# Altium PCB B303CA.PcbDoc
Units mm, origin at the board's own origin, x right, y up, seen from the top; angles counter-clockwise.
Board outline 29.99 x 10 mm, 4 copper layers (Top Layer, Int1, Int2, Bottom Layer), stack 1.547 mm thick; 2 components, 2 nets, 10 pads, 2 vias.
Unrouted connection lines stored in the file: 2.
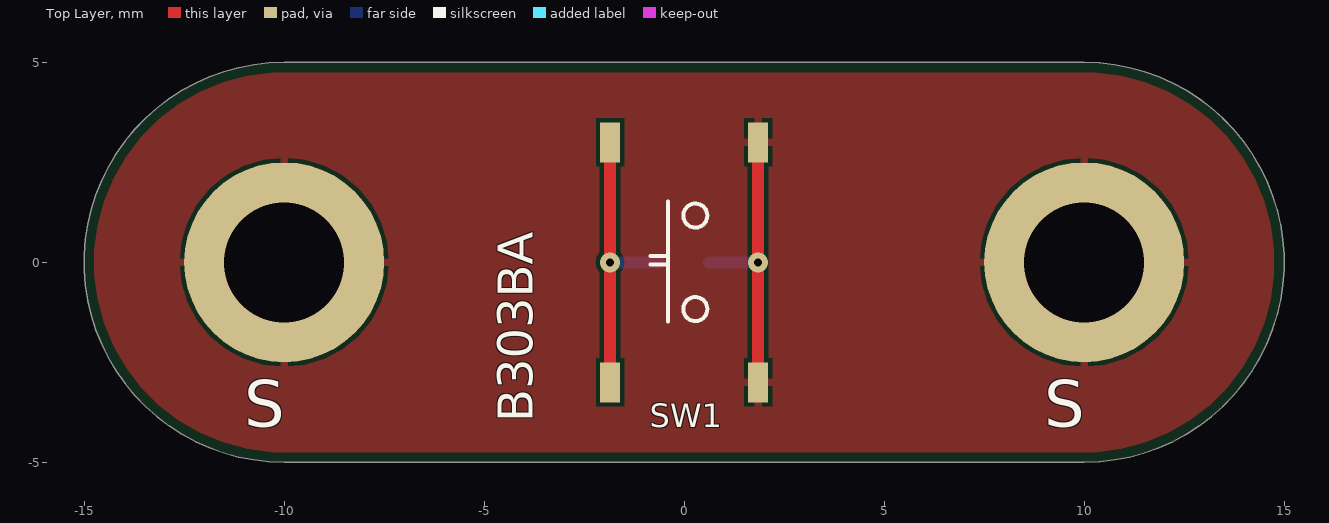
[diagram p0: Top Layer view]
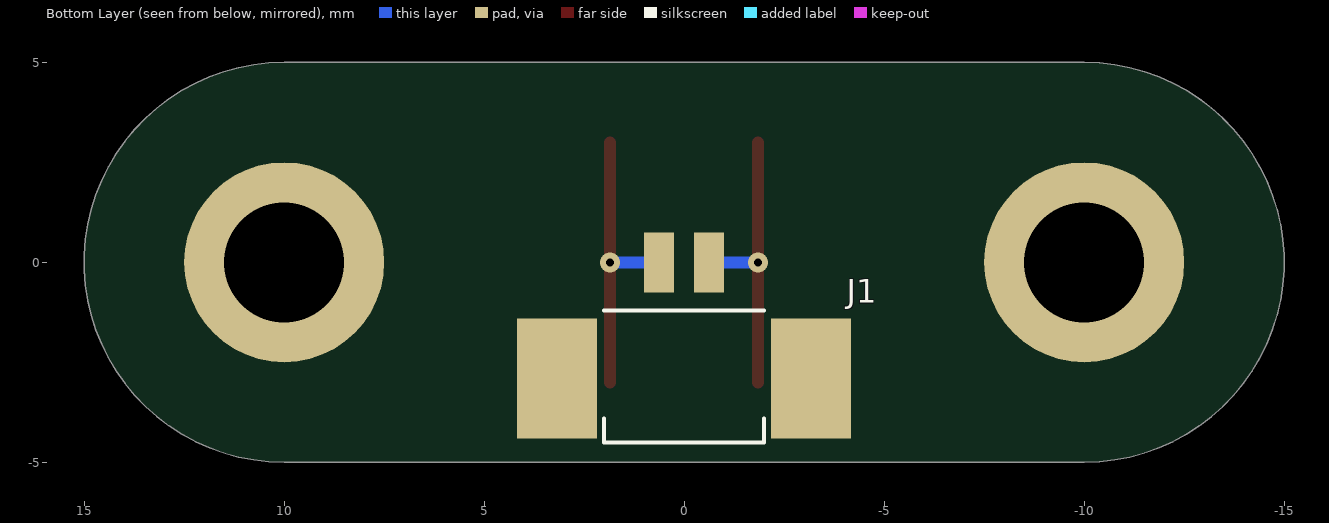
[diagram p1: Bottom Layer view, seen from below]

## Layer stack, top to bottom
Top Solder: solder mask 0.0254, SM-001, Dk 4
Top Layer: signal copper 0.035
Dielectric 1: prepreg 0.2083, PP-022, Dk 4.5
Int1: signal copper 0.035
Dielectric 3: core 0.9906, Core-042, Dk 4.6
Int2: signal copper 0.035
Dielectric 5: prepreg 0.2083, PP-022, Dk 4.5
Bottom Layer: signal copper 0.035
Bottom Solder: solder mask 0.0254, SM-001, Dk 4

## Board outline
-10,-5 10,-5 ccw(c10,0) 10,5 -10,5 ccw(c-10,0)

## Design rules (kind name [scope] priority, off if disabled: settings)
BoardOutlineClearance [All] p1: gap=0.25 ignorepadtopadclearanceinfootprint=FALSE except(0: Arc-SplitContinuation Track-SplitContinuation SMDPad-SplitContinuation THPad-SplitContinuation Via-SplitContinuation Fill-SplitContinuation Poly-SplitContinuation Region-SplitContinuation Text-SplitContinuation)
Clearance Clearance-xPP-xTP-xTT [All] p1: gap=0.1 ignorepadtopadclearanceinfootprint=FALSE except(0: Arc-Hole Track-Hole SMDPad-Hole THPad-Hole Via-Hole Fill-Hole Poly-Hole Region-Hole Text-Hole)
ComponentClearance [All] p1: gap=0.25 collisioncheckmode=3 verticalgap=0.25 showdistances=FALSE
DiffPairsRouting [All] p1: maxlimit=0.25 minlimit=0.25 mostfreqgap=0.25 toplayer_minwidth=0.381 toplayer_maxwidth=0.381 toplayer_prefwidth=0.381 midlayer1_minwidth=0.381 midlayer1_maxwidth=0.381 midlayer1_prefwidth=0.381 midlayer2_minwidth=0.381 midlayer2_maxwidth=0.381 midlayer2_prefwidth=0.381 bottomlayer_minwidth=0.381 bottomlayer_maxwidth=0.381 bottomlayer_prefwidth=0.381 maxuncoupledlength=12.5
Height [All] p1: minheight=0 maxheight=25 prefheight=12.5
HoleSize HoleSize-PTH [All] p1: absolutevalues=TRUE maxlimit=5 minlimit=0.15 maxpercent=80.000 minpercent=20.000
HoleToHoleClearance [All] p1: gap=0.35 allowstackedmicrovias=TRUE
MinimumAnnularRing "Minimum IAR  <= 0.45mm" [((ObjectKind = 'Pad') OR (ObjectKind = 'Via')) And (Layer = 'MultiLayer') And (HoleDiameter <= AsMM(0.45))] p1: minimumring=0.125 // minimum inner annular ring for pads <= 0.45mm finished hole size
MinimumAnnularRing "Minimum IAR  > 0.45mm" [((ObjectKind = 'Pad') OR (ObjectKind = 'Via')) And (Layer = 'MultiLayer') And (HoleDiameter > AsMM(0.45))] p2: minimumring=0.125 // minimum inner annular ring for pads > 0.45mm finished hole size
MinimumAnnularRing Minimum-IAR [All] p3: minimumring=0.125
MinimumSolderMaskSliver [All] p1: minsoldermaskwidth=0.08
PlaneClearance [InNet('ANT_GSM')] p1: clearance=0.05
PlaneClearance PlaneClearance-IPI [All] p2: clearance=0.25
PlaneConnect [All] p1: planeconnectstyle=Relief reliefexpansion=0.175 reliefentries=4 reliefconductorwidth=0.2 reliefairgap=0.1
PolygonConnect PolygonConnect_Via [All vs (ObjectKind = 'Via') And (HoleDiameter <= AsMM(0.45))] p1: connectstyle=Direct reliefconductorwidth=0.254 reliefentries=4 polygonreliefangle="90 Angle" airgapwidth=0.254
PolygonConnect PolygonConnect-xTW [All] p2: connectstyle=Relief reliefconductorwidth=0.2 reliefentries=4 polygonreliefangle="90 Angle" airgapwidth=0.1
RoutingCorners [All] p1: cornerstyle=45-Degree minsetback=2.5 maxsetback=2.5
RoutingVias "RoutingVias <= 0.45mm" [(ObjectKind = 'Via') And (HoleDiameter <= AsMM(0.45))] p1: holewidth=0.2 width=0.55 viastyle="Through Hole" minholewidth=0.15 minwidth=0.5 maxholewidth=0.45 maxwidth=0.8
RoutingVias "RoutingVias > 0.45mm" [(ObjectKind = 'Via') And (HoleDiameter > AsMM(0.45))] p2: holewidth=0.5 width=0.85 viastyle="Through Hole" minholewidth=0.5 minwidth=0.85 maxholewidth=0.9 maxwidth=1.25
SilkToSilkClearance [All] p1: silktosilkclearance=0.2
SilkToSolderMaskClearance SilkscreenOverComponentPads [IsPad] p1: minsilkscreentomaskgap=0.1 clearancetoexposedcopper=TRUE
SolderMaskExpansion SolderMaskExpansion_Via [(ObjectKind = 'Via') And (HoleDiameter <= AsMM(0.45))] p1: expansion=0.01 istentingtop=TRUE soldermaskfromhole=TRUE
SolderMaskExpansion [All] p2: expansion=0.01 istentingtop=FALSE
UnRoutedNet [All] p1: checkbadconnections=TRUE
Width Width-xTW [All] p1: maxlimit=1.5 minlimit=0.1 preferedwidth=0.2
18 further rules are at their usual default settings.

## Components (designator, comment, footprint, x,y, rotation, side; value= is the part's Value field where it differs from the comment)
J1 "2P SMD Tunic Connector" "Connector_Tunic 2P" 0,-1 r180 bottom
SW1 "PTS526SK08SMTR2LFS" PTS526_Switch 0,0 r90 top

## Footprints (in the part's own frame and the unit in brackets; to place one, negate y for a bottom-side part, rotate by r counter-clockwise, add the part's x,y. Pads: shape width x height; smd on the part's side, far side on the other; paste and mask are expansions set on the pad)
"Connector_Tunic 2P" [mm] "2P Tunic Connector"
  rect 0.75x1.5 smd mask+0.01: 1(-0.625,1) 2(0.625,1)
  rect 2x3 smd mask+0.01: 3(-3.175,-1.9) 4(3.175,-1.9)
  silkscreen extent -2,-3.5 2,-0.2, body extent -3.82,-4.1 3.83,1.1, height 3.4
PTS526_Switch [mm] "Tactile Swittch"
  rect 1x0.5 smd mask+0.01: 1(-3,1.85) 1(3,1.85) 2(-3,-1.85) 2(3,-1.85)
  silkscreen extent -1.47,-0.58 1.53,0.84, body extent -3.25,-2.54 3.25,2.54, height 1.52

## Part data
J1: library part "Connector - Mini Tunic 2P (1.25)", "Mini Tunic Connector with 2P", Manufacturer Name=Molex, Manufacturer Part Number=53261-0271, Mouser Part Number=538-53261-0271, Height=3.55mm, ROHS=Yes, System=Connector
SW1: library part "Switch - Push Button", "Switch Tactile N.O. SPST Flush Round Button Gull Wing 0.05A 12VDC 200000Cycles 2.45N SMD T/R", Case=SMD, Current Rating="50 mA", Manufacturer Name="C&K Switches", Voltage Rating="12 VDC", Contact Form=SPST, Manufacturer Part Number=PTS526SK08SMTR2LFS, Product Type="Tactile Switches", ROHS=Yes

## Free pads (board coordinates)
  round 5 hole 3: 2(-10,0) 2(10,0)

## Via types
v1: diameter 0.5, hole 0.2, Top Layer to Bottom Layer, tented both sides, 2 vias

## Nets (pads, with @x,y where several pads share a name; then routed paths per layer and width w, separated by ;. In a path a pad name is that pad's centre, name@x,y a point inside that pad or via, vN(x,y) a via of type N, cw(c..) or ccw(c..) an arc to the next point about the centre after c; other vN are vias at no path point)
SHOOT: J1.2 SW1.1 | length 7.2
  Top Layer w0.3: SW1.1@-1.85,-3 v1(-1.85,0) SW1.1@-1.85,3
  Bottom Layer w0.3: v1(-1.85,0) J1.2
VCC: J1.1 pad.2 SW1.2 | length 7.2
  Top Layer w0.3: SW1.2@1.85,-3 v1(1.85,0) SW1.2@1.85,3
  Bottom Layer w0.3: J1.1 v1(1.85,0)
pads on no net: J1.3 J1.4

## Polygon pours and split planes (outlines as drawn)
VCC on Top Layer "VCC_L01_P000" (solid, pour order 0): -10,-5 10,-5 ccw(c10,0) 10,5 -10,5 ccw(c-10,0)

## Silkscreen, mask and mechanical layers (free items; w line width, h text height)
Top Overlay:
  text "B303BA" at -3.5,-4 h1.5 r90
  text "S" at -11,-4.5 h2
  text "S" at 9,-4.5 h2
Top Solder:
  region: 1402 vertices and 36 holes, not listed, extent 3.542,-1.395 7.093,1.107
Board Shape:
  the board outline again, w0.254